# EAGLE board WAGband_2_on_board_final (EAGLE 7.5.0)
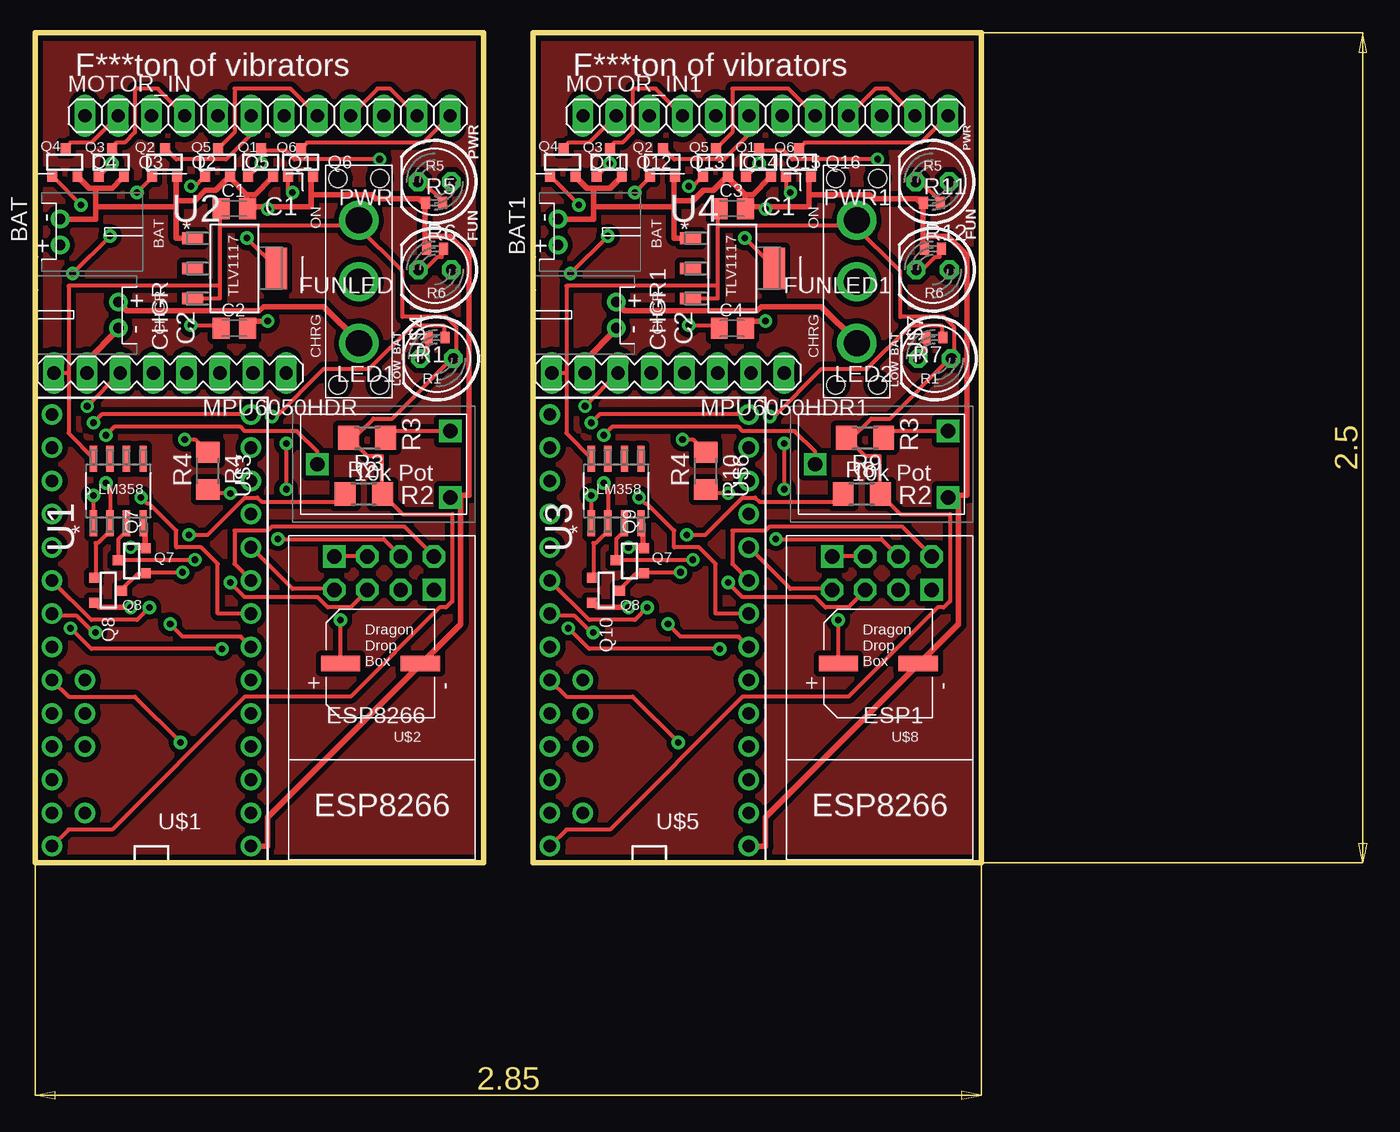
[diagram p0: board, top side]
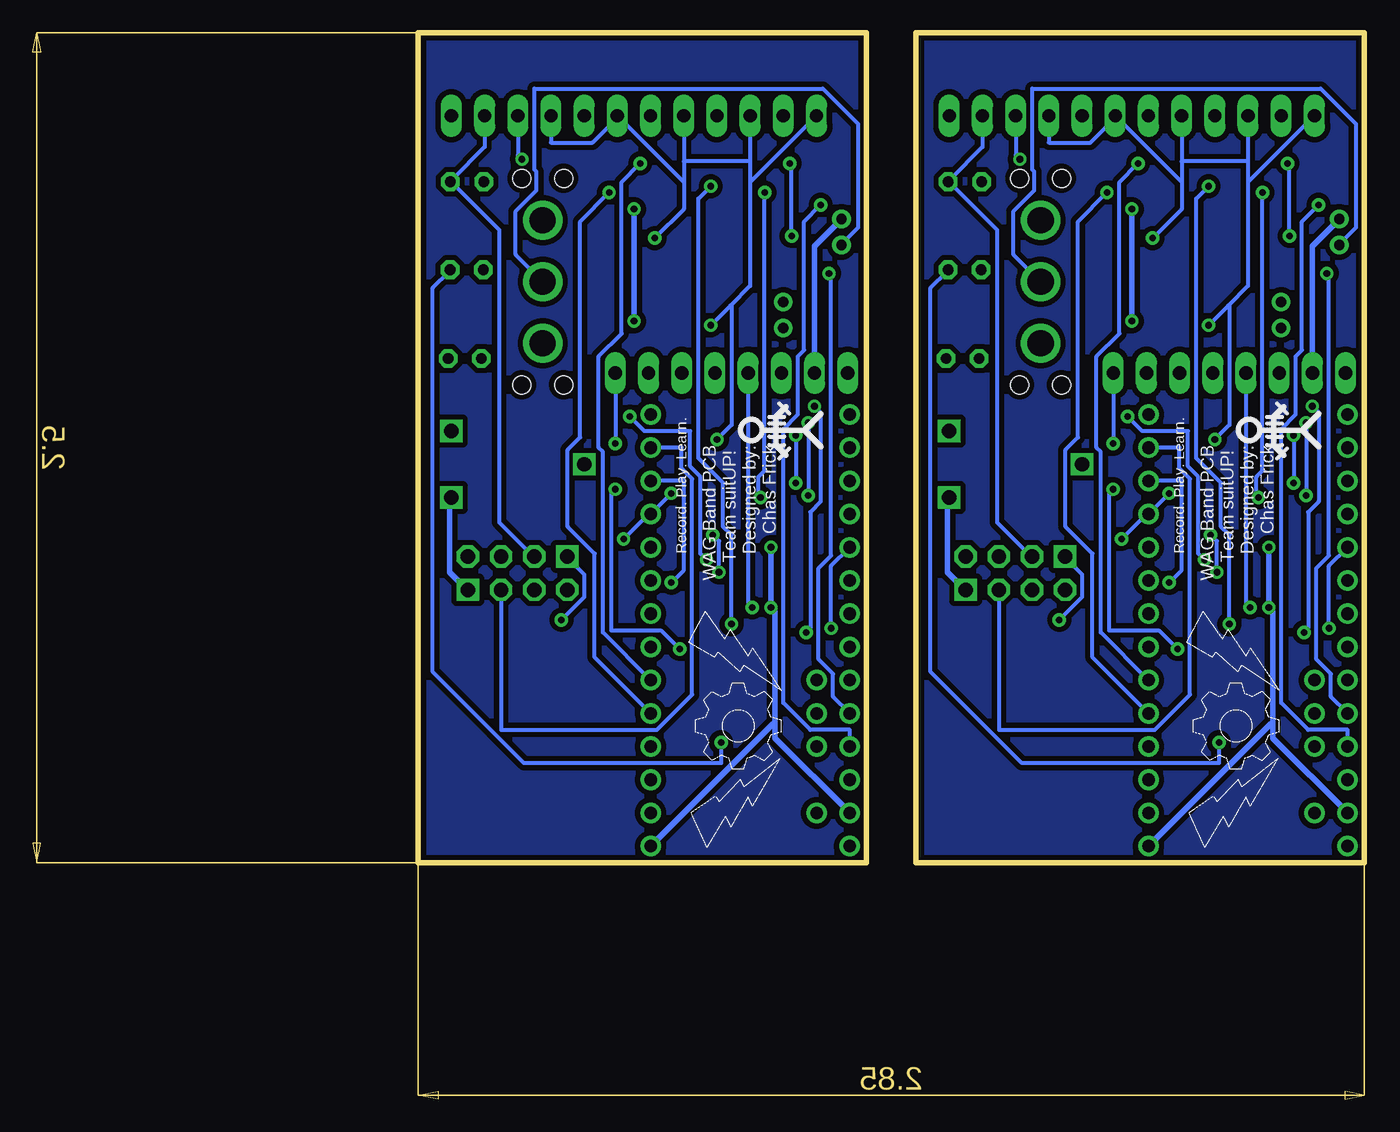
[diagram p1: board, bottom side, seen from below]

Size 72.39 x 63.5 mm. Coordinates in mm from the lower left corner, seen from the top.
Outline: 0,0 0,63.5 34.29,63.5 34.29,0 0,0
Outline: 38.1,0 38.1,63.5 72.39,63.5 72.39,0 38.1,0
Copper layers (1*16): Top 0.035mm / dielectric 1.5mm / Bottom 0.035mm
Design rules "default": minimum track width 8mil, minimum drill 20mil, track to track 10mil, track to pad 10mil, pad to pad 10mil, via to via 10mil, smd to smd 10mil, copper to edge 10mil, drill to drill 10mil, minimum pad ring 12mil, minimum via ring 10mil, stop-mask expansion 4mil, vias tented up to drill 20mil, thermal gap 10mil
Net classes: 0 default: width 0.305 mm, clearance 0.254 mm; 1 GND: width 0.406 mm, clearance 0.254 mm; 2 VCC: width 0.406 mm, clearance 0.254 mm

## Footprints (pad centres in the part's own frame; a part is rotated, then mirrored left to right if it is on the bottom)
JST-PH-2-THM-RA = drill 0.8 pad 1.422: 1 1,0; 2 -1,0
C0805K = smd 1.3 x 1.6: 1 -1,0; 2 1,0
ESP01 = drill 1.1 octagon: CH_PD -1.285,-8.178; GPIO0 1.255,-5.638; GPIO2 -1.285,-5.638; RST 1.255,-8.178; RX 3.795,-5.638; TX -3.825,-8.178 | drill 1.1 square: GND -3.825,-5.638; VCC 3.795,-8.178
LED5MM = drill 0.813 octagon: A -1.27,0; K 1.27,0
1X12 = drill 1.016 long: 1 -13.97,0; 2 -11.43,0; 3 -8.89,0; 4 -6.35,0; 5 -3.81,0; 6 -1.27,0; 7 1.27,0; 8 3.81,0; 9 6.35,0; 10 8.89,0; 11 11.43,0; 12 13.97,0
MPU6050 = drill 1.016 long: ADD 6.35,0; GND -6.35,0; INT 8.89,0; SCL -3.81,0; SDA -1.27,0; VCC -8.89,0; XCL 3.81,0; XDA 1.27,0
SOT-23 = smd 0.762 x 0.762: 1 -0.979,-1.101; 2 0.94,-1.101; 3 0.025,1.067
R0402 = smd 0.7 x 0.9: 1 -0.65,0; 2 0.65,0
R1206 = smd 1.6 x 1.803: 1 -1.422,0; 2 1.422,0
SOIC127P600X175-8N = smd 1.981 x 0.559: 1 -2.464,1.905; 2 -2.464,0.635; 3 -2.464,-0.635; 4 -2.464,-1.905; 5 2.464,-1.905; 6 2.464,-0.635; 7 2.464,0.635; 8 2.464,1.905
SOT230P700X180-4N = smd 1.626 x 0.889: 1 -3.2,2.311; 2 -3.2,0; 3 -3.2,-2.311 | smd 1.626 x 3.175: 4 3.2,0
TEENSY3-DIL+4 = drill 0.965: 0 -7.62,13.97; 1 -7.62,11.43; 2 -7.62,8.89; 3 -7.62,6.35; 3.3V 7.62,11.43; 4 -7.62,3.81; 5 -7.62,1.27; 6 -7.62,-1.27; 7 -7.62,-3.81; 8 -7.62,-6.35; 9 -7.62,-8.89; 10 -7.62,-11.43; 11 -7.62,-13.97; 12 -7.62,-16.51; 13 7.62,-16.51; 14/A0 7.62,-13.97; 15/A1 7.62,-11.43; 16/A2 7.62,-8.89; 17/A3 7.62,-6.35; 18/A4 7.62,-3.81; 19/A5 7.62,-1.27; 20/A6 7.62,1.27; 21/A7 7.62,3.81; 22/A8 7.62,6.35; 23/A9 7.62,8.89; A10 5.08,6.35; A11 5.08,3.81; AGND 7.62,13.97; AREF 5.08,8.89; GND -7.62,16.51; VIN 7.62,16.51; VUSB 5.08,13.97
TZV1000M = smd 1.2 x 3: + 0,3.05; - 0,-3.05
CB10 = drill 1.1 square: P$1 -2.54,-5.08; P$2 2.54,-5.08; P$3 0,5.08
SPDT = drill 2: P$1 0,-4.699; P$2 0,0; P$3 0,4.699 | hole 1.4: 1.6,7.899; -1.6,-7.899; 1.6,-7.899; -1.6,7.899

## Placement (x,y rotation side)
BAT  [JST-PH-2-THM-RA]  1.91,48.26 270 top
BAT1  [JST-PH-2-THM-RA]  40.01,48.26 270 top
C1  105  [C0805K]  15.24,50.04 0 top
C2  105  [C0805K]  15.24,40.89 0 top
C3  105  [C0805K]  53.34,50.04 0 top
C4  105  [C0805K]  53.34,40.89 0 top
CHGR  [JST-PH-2-THM-RA]  6.35,41.91 90 top
CHGR1  [JST-PH-2-THM-RA]  44.45,41.91 90 top
ESP1  ESP01  [ESP01]  64.77,15.24 180 top
ESP8266  ESP01  [ESP01]  26.67,15.24 180 top
FUNLED  [LED5MM]  30.58,45.36 180 top
FUNLED1  [LED5MM]  68.68,45.36 180 top
LED1  [LED5MM]  30.73,38.58 180 top
LED2  [LED5MM]  68.83,38.58 180 top
MOTOR_IN  [1X12]  17.78,57.15 0 top
MOTOR_IN1  [1X12]  55.88,57.15 0 top
MPU6050HDR  [MPU6050]  10.31,37.47 0 top
MPU6050HDR1  [MPU6050]  48.41,37.47 0 top
PWR  [LED5MM]  30.56,52.1 180 top
PWR1  [LED5MM]  68.66,52.1 180 top
Q1  [SOT-23]  17.27,53.59 0 top
Q2  [SOT-23]  9.91,53.59 0 top
Q3  [SOT-23]  5.84,53.59 0 top
Q4  [SOT-23]  2.29,53.59 0 top
Q5  [SOT-23]  13.97,53.59 0 top
Q6  [SOT-23]  20.32,53.59 0 top
Q7  [SOT-23]  7.37,23.11 90 top
Q8  [SOT-23]  5.59,20.83 270 top
Q9  [SOT-23]  45.47,23.11 90 top
Q10  [SOT-23]  43.69,20.83 270 top
Q11  [SOT-23]  40.39,53.59 0 top
Q12  [SOT-23]  43.94,53.59 0 top
Q13  [SOT-23]  48.01,53.59 0 top
Q14  [SOT-23]  52.07,53.59 0 top
Q15  [SOT-23]  55.37,53.59 0 top
Q16  [SOT-23]  58.42,53.59 0 top
R1  1k  [R0402]  30.71,40.18 180 top
R2  30k  [R1206]  25.15,28.19 0 top
R3  30k  [R1206]  25.4,32.51 180 top
R4  10k  [R1206]  13.21,29.97 270 top
R5  1k  [R0402]  30.51,50.5 0 top
R6  1k  [R0402]  30.58,46.96 0 top
R7  1k  [R0402]  68.81,40.18 180 top
R8  30k  [R1206]  63.25,28.19 0 top
R9  30k  [R1206]  63.5,32.51 180 top
R10  10k  [R1206]  51.31,29.97 270 top
R11  1k  [R0402]  68.61,50.5 0 top
R12  1k  [R0402]  68.68,46.96 0 top
U1  LM358DR  [SOIC127P600X175-8N]  6.35,28.45 90 top
U2  TLV1117-33CDCY  [SOT230P700X180-4N]  15.24,45.47 0 top
U3  LM358DR  [SOIC127P600X175-8N]  44.45,28.45 90 top
U4  TLV1117-33CDCY  [SOT230P700X180-4N]  53.34,45.47 0 top
U$1  TEENSY_3.1_DIL+4  [TEENSY3-DIL+4]  8.89,17.78 180 top
U$2  TZVCAP  [TZV1000M]  26.42,15.24 90 top
U$3  CB10LV103M  [CB10]  26.67,30.48 90 top
U$4  MS12ASW13  [SPDT]  24.77,44.45 0 top
U$5  TEENSY_3.1_DIL+4  [TEENSY3-DIL+4]  46.99,17.78 180 top
U$6  CB10LV103M  [CB10]  64.77,30.48 90 top
U$7  MS12ASW13  [SPDT]  62.87,44.45 0 top
U$8  TZVCAP  [TZV1000M]  64.52,15.24 90 top

## Library data of the parts
BAT BAT1 CHGR CHGR1 = adafruit
C1-C4 R1-R12 = resistor
ESP1 ESP8266 MPU6050HDR MPU6050HDR1 Q1-Q16 U$2-U$4 U$6-U$8 = mqp_custom_parts
FUNLED FUNLED1 LED1 LED2 PWR PWR1 = led
MOTOR_IN MOTOR_IN1 = pinhead
U1 U3 = Texas Instruments_By_element14_Batch_1; MPN: LM358DR; OC_FARNELL: 1831865; OC_NEWARK: 34K7599; PACKAGE: SOIC-8; SUPPLIER: Texas Instruments
U2 U4 = Texas Instruments_By_element14_Batch_1; MPN: TLV1117-33CDCY; OC_FARNELL: 1494942; OC_NEWARK: 67K8520; PACKAGE: SOT-223-3; SUPPLIER: TEXAS INSTRUMENTS
U$1 U$5 = Teensy_3_and_LC_Series_Boards_v1.1

## Nets
3.3V: U$1.3.3V
3.3V1: U$5.3.3V
AREF: U$1.AREF
AREF1: U$5.AREF
ESP8266_!RST: ESP8266.CH_PD R4.2 U$1.9
ESP8266_!RST1: ESP1.CH_PD R10.2 U$5.9
ESP8266_RX: ESP8266.RX U$1.8
ESP8266_RX1: ESP1.RX U$5.8
ESP8266_TX: ESP8266.TX U$1.7
ESP8266_TX1: ESP1.TX U$5.7
GND [GND]: BAT.2 C1.2 C2.2 CHGR.2 ESP8266.GND MPU6050HDR.GND Q1.2 Q2.2 Q3.2 Q4.2 Q5.2 Q6.2 Q7.2 Q8.2 R5.1 R6.1 U1.4 U2.1 U$1.AGND U$1.GND U$2.- U$3.P$1
GND1 [GND]: BAT1.2 C3.2 C4.2 CHGR1.2 ESP1.GND MPU6050HDR1.GND Q9.2 Q10.2 Q11.2 Q12.2 Q13.2 Q14.2 Q15.2 Q16.2 R11.1 R12.1 U3.4 U4.1 U$5.AGND U$5.GND U$6.P$1 U$8.-
GPIO0: ESP8266.GPIO0 U$1.10
GPIO1: ESP1.GPIO2 U$5.11
GPIO2: ESP8266.GPIO2 U$1.11
GPIO3: ESP1.GPIO0 U$5.10
LED_REF: Q7.3 R1.1 U1.3
LED_REF1: Q9.3 R7.1 U3.3
LOW_BATT_DIO: U1.1 U$1.12
LOW_BATT_DIO1: U3.1 U$5.12
M1: Q1.1 U$1.4
M2: Q2.1 U$1.6
M3: Q3.1 U$1.22/A8
M4: Q4.1 U$1.23/A9
M5: Q5.1 U$1.5
M6: Q6.1 U$1.3
M7: Q13.1 U$5.6
M8: Q14.1 U$5.5
M9: Q15.1 U$5.4
M10: Q16.1 U$5.3
M11: Q12.1 U$5.22/A8
M12: Q11.1 U$5.23/A9
N$1: MPU6050HDR.INT U$1.17/A3
N$2: MPU6050HDR.SDA U$1.18/A4
N$3: FUNLED.A U$1.21/A7
N$4: FUNLED.K R6.2
N$7: MOTOR_IN1.12 Q16.3
N$8: MOTOR_IN1.10 Q15.3
N$9: MOTOR_IN.12 Q6.3
N$10: MOTOR_IN.10 Q1.3
N$11: MOTOR_IN.8 Q5.3
N$12: MOTOR_IN1.8 Q14.3
N$13: MOTOR_IN.6 Q2.3
N$14: MOTOR_IN.2 Q4.3
N$15: MOTOR_IN.4 Q3.3
N$16: MOTOR_IN1.6 Q13.3
N$17: MPU6050HDR.SCL U$1.19/A5
N$18: MOTOR_IN1.2 Q11.3
N$19: MOTOR_IN1.4 Q12.3
N$20: MPU6050HDR1.SCL U$5.19/A5
N$21: PWR.K R5.2
N$22: LED1.K R1.2
N$23: Q7.1 Q8.3 R2.1
N$24: PWR1.K R11.2
N$25: LED2.K R7.2
N$26: Q9.1 Q10.3 R8.1
N$27: R3.1 U$3.P$2
N$28: BAT.1 U$4.P$2
N$29 [VCC]: CHGR.1 U$4.P$1
N$30: R9.1 U$6.P$2
N$31: BAT1.1 U$7.P$2
N$32 [VCC]: CHGR1.1 U$7.P$1
N$33: MPU6050HDR1.INT U$5.17/A3
N$34: MPU6050HDR1.SDA U$5.18/A4
N$35: FUNLED1.K R12.2
N$36: FUNLED1.A U$5.21/A7
POT_REF: Q8.1 U1.2 U$3.P$3
POT_REF1: Q10.1 U3.2 U$6.P$3
VCC: C2.1 ESP8266.RST ESP8266.VCC MOTOR_IN.1 MOTOR_IN.3 MOTOR_IN.5 MOTOR_IN.7 MOTOR_IN.9 MOTOR_IN.11 PWR.A R4.1 U2.4 U$2.+
VCC1: C4.1 ESP1.RST ESP1.VCC MOTOR_IN1.1 MOTOR_IN1.3 MOTOR_IN1.5 MOTOR_IN1.7 MOTOR_IN1.9 MOTOR_IN1.11 PWR1.A R10.1 U4.4 U$8.+
VDD: C1.1 LED1.A MPU6050HDR.VCC R2.2 R3.2 U1.8 U2.3 U$1.VIN U$4.P$3
VDD1: C3.1 LED2.A MPU6050HDR1.VCC R8.2 R9.2 U3.8 U4.3 U$5.VIN U$7.P$3
VUSB: U$1.VUSB
VUSB1: U$5.VUSB

## Tracks (layer width: path | path; a pad name or v marks a point on that pad's centre or on a via)
ESP8266_!RST  (via drill 0.51)
  Top 0.305: v14.92,28.26 13.49,28.26 13.34,28.42 R4.2 | v18.57,24.77 26.67,24.77 27.94,23.5 ESP8266.CH_PD
  Bottom 0.305: v14.92,28.26 U$1.9 16.51,26.83 v18.57,24.77
ESP8266_!RST1  (via drill 0.51)
  Top 0.305: v53.02,28.26 51.59,28.26 51.44,28.42 R10.2 | v56.67,24.77 64.77,24.77 66.04,23.5 ESP1.CH_PD
  Bottom 0.305: v53.02,28.26 U$5.9 54.61,26.83 v56.67,24.77
ESP8266_RX
  Top 0.305: U$1.8 19.68,20.95 22.86,20.95 ESP8266.RX
ESP8266_RX1
  Top 0.305: U$5.8 57.78,20.95 60.96,20.95 ESP1.RX
ESP8266_TX
  Top 0.305: U$1.7 15.24,22.86 15.24,25.4 17.78,25.4 18.1,25.72 28.26,25.72 30.48,23.5 ESP8266.TX
ESP8266_TX1
  Top 0.305: U$5.7 53.34,22.86 53.34,25.4 55.88,25.4 56.2,25.72 66.36,25.72 68.58,23.5 ESP1.TX
GND  (via drill 0.51)
  Top 0.406: 29.84,47.94 29.84,46.99 R6.1 | 29.84,47.94 29.84,50.48 R5.1 29.69,50.48 29.37,50.8 26.04,50.8 25.72,51.12 21.11,51.12 | 16.19,51.12 14.92,52.39 Q5.2 14.76,52.39 13.81,51.44 13.02,51.44 12.22,50.64 10.79,50.64 | 16.19,51.12 16.19,50.16 C1.2 16.35,50.16 17.78,50.16 | 16.19,51.12 16.83,51.12 18.1,52.39 Q1.2 | 21.11,51.12 21.11,50.16 17.78,50.16 | 21.11,51.12 21.11,52.39 Q6.2 | v17.78,41.43 16.83,41.43 16.35,40.96 C2.2 | v17.78,50.01 17.78,50.16 | CHGR.2 6.35,40.8 3.97,38.42 MPU6050HDR.GND | 10.79,50.16 10.79,47.78 11.91,47.78 U2.1 | 10.79,50.16 10.79,50.64 | 10.79,50.64 10.79,52.39 Q2.2 | 4.6,51.59 5.87,51.59 6.67,52.39 Q3.2 | 4.6,51.59 4.13,51.59 3.33,52.39 Q4.2 | 4.6,50.16 4.6,49.21 1.91,49.21 BAT.2 | 4.6,50.16 4.6,51.59 | 4.6,50.16 10.79,50.16 | U1.4 8.26,25.88 8.41,25.88 8.41,24.13 Q7.2 8.26,24.13 v7.3,24.13 | v7.3,19.53 4.92,19.53 4.6,19.84 Q8.2 | U$1.GND 17.78,1.27 17.78,3.49 29.37,15.08 U$2.- 29.53,15.24 32.54,18.26 32.54,27.94 U$3.P$1 32.54,28.1 33.18,28.1 33.18,46.51 31.75,47.94 29.84,47.94
  Bottom 0.406: v17.78,50.01 v17.78,41.43 | MPU6050HDR.GND 3.97,47.15 1.91,49.21 BAT.2 | U$3.P$1 31.91,27.78 31.91,22.23 30.64,20.95 ESP8266.GND | 6.99,10.64 6.99,9.53 U$1.AGND | 6.99,10.64 6.99,19.21 v7.3,19.53 v7.3,24.13 | U$1.GND 7.14,10.64 6.99,10.64
GND1  (via drill 0.51)
  Top 0.406: 67.94,47.94 67.94,46.99 R12.1 | 67.94,47.94 67.94,50.48 R11.1 67.79,50.48 67.47,50.8 64.14,50.8 63.82,51.12 59.21,51.12 | 54.29,51.12 53.02,52.39 Q14.2 52.86,52.39 51.91,51.44 51.12,51.44 50.32,50.64 48.9,50.64 | 54.29,51.12 54.29,50.16 C3.2 54.45,50.16 55.88,50.16 | 54.29,51.12 54.93,51.12 56.2,52.39 Q15.2 | 59.21,51.12 59.21,50.16 55.88,50.16 | 59.21,51.12 59.21,52.39 Q16.2 | v55.88,41.43 54.93,41.43 54.45,40.96 C4.2 | v55.88,50.01 55.88,50.16 | CHGR1.2 44.45,40.8 42.07,38.42 MPU6050HDR1.GND | 48.9,50.16 48.9,47.78 50.01,47.78 U4.1 | 48.9,50.16 48.9,50.64 | 48.9,50.64 48.9,52.39 Q13.2 | 42.7,51.59 43.97,51.59 44.77,52.39 Q12.2 | 42.7,51.59 42.23,51.59 41.43,52.39 Q11.2 | 42.7,50.16 42.7,49.21 40.01,49.21 BAT1.2 | 42.7,50.16 42.7,51.59 | 42.7,50.16 48.9,50.16 | U3.4 46.35,25.88 46.51,25.88 46.51,24.13 Q9.2 46.35,24.13 v45.4,24.13 | v45.4,19.53 43.02,19.53 42.7,19.84 Q10.2 | U$5.GND 55.88,1.27 55.88,3.49 67.47,15.08 U$8.- 67.63,15.24 70.64,18.26 70.64,27.94 U$6.P$1 70.64,28.1 71.28,28.1 71.28,46.51 69.85,47.94 67.94,47.94
  Bottom 0.406: v55.88,50.01 v55.88,41.43 | MPU6050HDR1.GND 42.07,47.15 40.01,49.21 BAT1.2 | U$6.P$1 70.01,27.78 70.01,22.23 68.74,20.95 ESP1.GND | 45.09,10.64 45.09,9.53 U$5.AGND | 45.09,10.64 45.09,19.21 v45.4,19.53 v45.4,24.13 | U$5.GND 45.24,10.64 45.09,10.64
GPIO0  (via drill 0.51)
  Top 0.305: v14.92,21.43 16.03,20.32 21.59,20.32 22.38,19.53 24.13,19.53 25.4,20.8 ESP8266.GPIO0
  Bottom 0.305: U$1.10 13.97,29.21 13.97,22.38 v14.92,21.43
GPIO1
  Bottom 0.305: U$5.11 52.23,31.75 52.23,30.16 51.44,29.37 51.44,12.86 54.13,10.16 66.04,10.16 66.04,20.8 ESP1.GPIO2
GPIO2
  Bottom 0.305: U$1.11 14.13,31.75 14.13,30.16 13.34,29.37 13.34,12.86 16.03,10.16 27.94,10.16 27.94,20.8 ESP8266.GPIO2
GPIO3  (via drill 0.51)
  Top 0.305: v53.02,21.43 54.13,20.32 59.69,20.32 60.48,19.53 62.23,19.53 63.5,20.8 ESP1.GPIO0
  Bottom 0.305: U$5.10 52.07,29.21 52.07,22.38 v53.02,21.43
LED_REF  (via drill 0.51)
  Top 0.305: 6.35,23.18 6.35,24.77 6.99,25.4 U1.3 | v18.1,34.13 18.41,34.13 22.07,37.78 25.56,37.78 28.89,41.12 31.27,41.12 31.27,40.32 R1.1 | 6.35,23.18 v12.22,23.18 | 6.35,23.18 Q7.3
  Bottom 0.305: v18.1,34.13 16.99,33.02 13.49,33.02 13.49,30.32 12.7,29.53 12.7,23.65 v12.22,23.18
LED_REF1  (via drill 0.51)
  Top 0.305: 44.45,23.18 44.45,24.77 45.09,25.4 U3.3 | v56.2,34.13 56.52,34.13 60.17,37.78 63.66,37.78 66.99,41.12 69.37,41.12 69.37,40.32 R7.1 | 44.45,23.18 v50.32,23.18 | 44.45,23.18 Q9.3
  Bottom 0.305: v56.2,34.13 55.09,33.02 51.59,33.02 51.59,30.32 50.8,29.53 50.8,23.65 v50.32,23.18
LOW_BATT_DIO  (via drill 0.51)
  Top 0.305: v4.45,28.1 U1.1 | v4.45,33.66 5.08,34.29 U$1.12
  Bottom 0.305: v4.45,33.66 v4.45,28.1
LOW_BATT_DIO1  (via drill 0.51)
  Top 0.305: v42.55,28.1 U3.1 | v42.55,33.66 43.18,34.29 U$5.12
  Bottom 0.305: v42.55,33.66 v42.55,28.1
M1  (via drill 0.51)
  Top 0.305: v17.3,53.5 16.35,52.55 Q1.1
  Bottom 0.305: v17.3,53.5 18.73,52.07 18.73,40.48 20.48,38.73 20.48,31.75 20.16,31.43 20.16,17.62 U$1.4
M2  (via drill 0.51)
  Top 0.305: v7.78,51.28 8.89,52.39 Q2.1 | v8.1,27.94 8.57,27.46 8.73,27.46 10.79,25.4 10.79,24.13 12.7,24.13 13.97,22.86 13.97,19.05 U$1.6
  Bottom 0.305: v7.78,51.28 7.78,30 8.26,29.53 8.26,28.1 v8.1,27.94
M3  (via drill 0.51)
  Top 0.305: v5.87,53.5 4.92,52.55 Q3.1 | v2.86,45.09 v5.71,47.94
  Bottom 0.305: v5.87,53.5 5.71,53.34 v5.71,47.94 | v2.86,45.09 2.7,44.93 2.7,23.5 3.65,22.54 3.65,15.56 2.54,14.45 2.54,12.7 U$1.22/A8
M4  (via drill 0.51)
  Top 0.305: v3.49,50.32 1.43,52.39 Q4.1
  Bottom 0.305: v3.49,50.32 4.76,49.05 4.76,39.21 5.24,38.73 5.24,34.29 6.35,33.18 6.35,12.22 4.29,10.16 1.27,10.16 U$1.23/A9
M5  (via drill 0.51)
  Top 0.305: v11.91,51.75 12.22,51.75 12.86,52.39 Q5.1 | v10.32,18.26 11.27,17.3 15.72,17.3 U$1.5
  Bottom 0.305: v11.91,51.75 12.86,50.8 12.86,30.96 10.95,29.05 10.95,25.72 10.32,25.08 v10.32,18.26
M6  (via drill 0.51)
  Top 0.305: v19.68,51.28 19.37,51.28 19.37,52.39 Q6.1
  Bottom 0.305: v19.68,51.28 21.91,49.05 21.91,32.54 22.86,31.59 22.86,25.72 20.8,23.65 20.8,15.72 U$1.3
M7  (via drill 0.51)
  Top 0.305: v45.88,51.28 46.99,52.39 Q13.1 | v46.2,27.94 46.67,27.46 46.83,27.46 48.9,25.4 48.9,24.13 50.8,24.13 52.07,22.86 52.07,19.05 U$5.6
  Bottom 0.305: v45.88,51.28 45.88,30 46.35,29.53 46.35,28.1 v46.2,27.94
M8  (via drill 0.51)
  Top 0.305: v50.01,51.75 50.32,51.75 50.96,52.39 Q14.1 | v48.42,18.26 49.37,17.3 53.82,17.3 U$5.5
  Bottom 0.305: v50.01,51.75 50.96,50.8 50.96,30.96 49.05,29.05 49.05,25.72 48.42,25.08 v48.42,18.26
M9  (via drill 0.51)
  Top 0.305: v55.4,53.5 54.45,52.55 Q15.1
  Bottom 0.305: v55.4,53.5 56.83,52.07 56.83,40.48 58.58,38.73 58.58,31.75 58.26,31.43 58.26,17.62 U$5.4
M10  (via drill 0.51)
  Top 0.305: v57.78,51.28 57.47,51.28 57.47,52.39 Q16.1
  Bottom 0.305: v57.78,51.28 60.01,49.05 60.01,32.54 60.96,31.59 60.96,25.72 58.9,23.65 58.9,15.72 U$5.3
M11  (via drill 0.51)
  Top 0.305: v43.97,53.5 43.02,52.55 Q12.1 | v40.96,45.09 v43.81,47.94
  Bottom 0.305: v43.97,53.5 43.81,53.34 v43.81,47.94 | v40.96,45.09 40.8,44.93 40.8,23.5 41.75,22.54 41.75,15.56 40.64,14.45 40.64,12.7 U$5.22/A8
M12  (via drill 0.51)
  Top 0.305: v41.59,50.32 39.53,52.39 Q11.1
  Bottom 0.305: v41.59,50.32 42.86,49.05 42.86,39.21 43.34,38.73 43.34,34.29 44.45,33.18 44.45,12.22 42.39,10.16 39.37,10.16 U$5.23/A9
N$1  (via drill 0.51)
  Top 0.305: v2.7,17.94 4.29,16.35 v14.29,16.35 | v19.21,32.07 v19.21,28.57
  Bottom 0.305: U$1.17/A3 2.7,22.7 v2.7,17.94 | v14.29,16.35 15.72,17.78 19.53,17.78 19.53,28.26 v19.21,28.57 | v19.21,32.07 MPU6050HDR.INT
N$2  (via drill 0.51)
  Top 0.305: U$1.18/A4 4.29,18.57 7.78,18.57 v8.73,19.53
  Bottom 0.305: v8.73,19.53 9.05,19.84 MPU6050HDR.SDA
N$3  (via drill 0.51)
  Top 0.305: v11.11,9.21 7.62,12.7 2.54,12.7 U$1.21/A7
  Bottom 0.305: v11.11,9.21 11.11,7.62 26.19,7.62 33.18,14.61 33.18,43.97 31.91,45.24 FUNLED.A
N$4
  Top 0.305: R6.2 31.11,46.83 31.11,46.35 30.8,46.35 29.84,45.4 29.37,45.4 FUNLED.K
N$7
  Top 0.305: MOTOR_IN1.12 67.79,55.09 58.9,55.09 58.58,54.77 Q16.3
N$8  (via drill 0.51)
  Top 0.305: v64.45,53.82 57.94,53.82 57.31,54.45 55.56,54.45 55.4,54.61 Q15.3
  Bottom 0.305: v64.45,53.82 64.77,54.13 MOTOR_IN1.10
N$9
  Top 0.305: MOTOR_IN.12 29.69,55.09 20.8,55.09 20.48,54.77 Q6.3
N$10  (via drill 0.51)
  Top 0.305: v26.35,53.82 19.84,53.82 19.21,54.45 17.46,54.45 17.3,54.61 Q1.3
  Bottom 0.305: v26.35,53.82 26.67,54.13 MOTOR_IN.10
N$11
  Top 0.305: MOTOR_IN.8 19.53,59.21 15.24,59.21 15.24,55.88 14.13,54.77 Q5.3
N$12
  Top 0.305: MOTOR_IN1.8 57.63,59.21 53.34,59.21 53.34,55.88 52.23,54.77 Q14.3
N$13
  Top 0.305: MOTOR_IN.6 16.51,55.72 14.61,53.82 10.79,53.82 10,54.61 Q2.3
N$14
  Top 0.305: MOTOR_IN.2 4.29,55.09 2.7,55.09 2.38,54.77 Q4.3
N$15
  Top 0.305: MOTOR_IN.4 9.37,59.21 7.62,59.21 7.62,55.88 6.83,55.09 6.19,55.09 5.87,54.77 Q3.3
N$16
  Top 0.305: MOTOR_IN1.6 54.61,55.72 52.7,53.82 48.9,53.82 48.1,54.61 Q13.3
N$17  (via drill 0.51)
  Top 0.305: U$1.19/A5 1.43,18.89 3.17,18.89 4.45,17.62 v4.6,17.62 | v3.97,34.92 MPU6050HDR.SCL
  Bottom 0.305: v4.6,17.62 4.29,17.94 4.29,26.83 3.49,27.62 3.49,34.45 v3.97,34.92
N$18
  Top 0.305: MOTOR_IN1.2 42.39,55.09 40.8,55.09 40.48,54.77 Q11.3
N$19
  Top 0.305: MOTOR_IN1.4 47.47,59.21 45.72,59.21 45.72,55.88 44.93,55.09 44.29,55.09 43.97,54.77 Q12.3
N$20  (via drill 0.51)
  Top 0.305: U$5.19/A5 39.53,18.89 41.27,18.89 42.55,17.62 v42.7,17.62 | v42.07,34.92 MPU6050HDR1.SCL
  Bottom 0.305: v42.7,17.62 42.39,17.94 42.39,26.83 41.59,27.62 41.59,34.45 v42.07,34.92
N$21
  Top 0.305: R5.2 31.11,50.64 29.69,52.07 29.37,52.07 PWR.K
N$22
  Top 0.305: R1.2 30,40.16 30,38.73 29.53,38.73 LED1.K
N$23  (via drill 0.51)
  Top 0.305: Q8.3 6.67,20.95 7.78,22.07 8.41,22.07 Q7.1 8.57,22.23 v11.27,22.23 | v11.75,25.08 13.18,25.08 16.03,27.94 16.99,27.94 17.3,27.62 23.18,27.62 23.65,28.1 R2.1
  Bottom 0.305: v11.75,25.08 11.27,24.61 v11.27,22.23
N$24
  Top 0.305: R11.2 69.22,50.64 67.79,52.07 67.47,52.07 PWR1.K
N$25
  Top 0.305: R7.2 68.1,40.16 68.1,38.73 67.63,38.73 LED2.K
N$26  (via drill 0.51)
  Top 0.305: Q10.3 44.77,20.95 45.88,22.07 46.51,22.07 Q9.1 46.67,22.23 v49.37,22.23 | v49.85,25.08 51.28,25.08 54.13,27.94 55.09,27.94 55.4,27.62 61.28,27.62 61.75,28.1 R8.1
  Bottom 0.305: v49.85,25.08 49.37,24.61 v49.37,22.23
N$27
  Top 0.305: U$3.P$2 27.3,33.02 26.83,32.54 R3.1
N$28
  Bottom 0.305: U$4.P$2 26.83,46.51 26.83,49.85 25.24,51.44 25.24,52.86 25.4,53.02 25.4,59.21 3.33,59.21 0.64,56.52 0.64,48.58 1.91,47.31 BAT.1
N$29
  Top 0.406: CHGR.1 6.35,42.86 6.99,42.23 17.14,42.23 17.46,42.55 22.07,42.55 24.77,39.85 U$4.P$1
N$30
  Top 0.305: U$6.P$2 65.41,33.02 64.93,32.54 R9.1
N$31
  Bottom 0.305: U$7.P$2 64.93,46.51 64.93,49.85 63.34,51.44 63.34,52.86 63.5,53.02 63.5,59.21 41.43,59.21 38.73,56.52 38.73,48.58 40.01,47.31 BAT1.1
N$32
  Top 0.406: CHGR1.1 44.45,42.86 45.09,42.23 55.24,42.23 55.56,42.55 60.17,42.55 62.87,39.85 U$7.P$1
N$33  (via drill 0.51)
  Top 0.305: v40.8,17.94 42.39,16.35 v52.39,16.35 | v57.31,32.07 v57.31,28.57
  Bottom 0.305: U$5.17/A3 40.8,22.7 v40.8,17.94 | v52.39,16.35 53.82,17.78 57.63,17.78 57.63,28.26 v57.31,28.57 | v57.31,32.07 MPU6050HDR1.INT
N$34  (via drill 0.51)
  Top 0.305: U$5.18/A4 42.39,18.57 45.88,18.57 v46.83,19.53
  Bottom 0.305: v46.83,19.53 47.15,19.84 MPU6050HDR1.SDA
N$35
  Top 0.305: R12.2 69.22,46.83 69.22,46.35 68.9,46.35 67.94,45.4 67.47,45.4 FUNLED1.K
N$36  (via drill 0.51)
  Top 0.305: v49.21,9.21 45.72,12.7 40.64,12.7 U$5.21/A7
  Bottom 0.305: v49.21,9.21 49.21,7.62 64.29,7.62 71.28,14.61 71.28,43.97 70.01,45.24 FUNLED1.A
POT_REF  (via drill 0.51)
  Top 0.305: Q8.1 4.6,21.91 4.6,24.45 4.76,24.45 5.71,25.4 U1.2 5.71,29.05 v5.4,29.05 | v5.4,32.7 6.03,33.34 15.72,33.34 16.03,33.02 20,33.02 21.59,31.43 U$3.P$3
  Bottom 0.305: v5.4,32.7 v5.4,29.05
POT_REF1  (via drill 0.51)
  Top 0.305: Q10.1 42.7,21.91 42.7,24.45 42.86,24.45 43.81,25.4 U3.2 43.81,29.05 v43.5,29.05 | v43.5,32.7 44.13,33.34 53.82,33.34 54.13,33.02 58.1,33.02 59.69,31.43 U$6.P$3
  Bottom 0.305: v43.5,32.7 v43.5,29.05
S$9
  pour Top (isolate 0.406): 0,0 0,63.5 34.29,63.5 34.29,62.87 34.29,0
S$10
  pour Top (isolate 0.406): 38.1,63.5 72.39,63.5 72.39,0 38.1,0
S$11
  pour Bottom (isolate 0.406): 0,63.5 34.29,63.5 34.29,0 0,0
S$12
  pour Bottom (isolate 0.406): 38.1,63.5 72.39,63.5 72.39,0 38.1,0
VCC  (via drill 0.51)
  Top 0.305: v16.19,47.78 18.41,45.56 U2.4 | v11.91,41.12 13.97,41.12 14.13,40.96 C2.1 | v11.43,32.38 12.22,32.38 13.18,31.43 R4.1 | v23.34,18.57 23.34,15.24 U$2.+ | ESP8266.RST 25.4,23.5 23.02,23.5 ESP8266.VCC | MOTOR_IN.9 26.19,59.21 27.15,59.21 MOTOR_IN.11
  Bottom 0.305: v16.19,47.78 13.97,50.01 13.97,52.07 | MOTOR_IN.5 13.97,53.66 | 13.97,53.66 13.97,52.07 | 13.97,52.07 MOTOR_IN.7 19.05,56.99 20.95,55.09 24.13,55.09 MOTOR_IN.9 | 10.4,42.62 8.89,44.13 8.89,52.07 | 10.4,42.62 v11.91,41.12 | MOTOR_IN.3 8.89,53.66 | 8.89,53.66 8.89,52.07 | v11.43,32.38 10.32,33.5 10.32,42.55 10.4,42.62 | 8.89,52.07 MOTOR_IN.1 | 8.89,53.66 13.97,53.66 | v23.34,18.57 21.59,20.32 21.59,22.07 22.86,23.34 ESP8266.VCC | MOTOR_IN.11 29.21,54.77 31.75,52.23 PWR.A 31.75,52.07 28.1,48.42 28.1,26.04 25.56,23.5 ESP8266.RST
VCC1  (via drill 0.51)
  Top 0.305: v54.29,47.78 56.52,45.56 U4.4 | v50.01,41.12 52.07,41.12 52.23,40.96 C4.1 | v49.53,32.38 50.32,32.38 51.28,31.43 R10.1 | v61.44,18.57 61.44,15.24 U$8.+ | ESP1.RST 63.5,23.5 61.12,23.5 ESP1.VCC | MOTOR_IN1.9 64.29,59.21 65.25,59.21 MOTOR_IN1.11
  Bottom 0.305: v54.29,47.78 52.07,50.01 52.07,52.07 | MOTOR_IN1.5 52.07,53.66 | 52.07,53.66 52.07,52.07 | 52.07,52.07 MOTOR_IN1.7 57.15,56.99 59.05,55.09 62.23,55.09 MOTOR_IN1.9 | 48.5,42.62 46.99,44.13 46.99,52.07 | 48.5,42.62 v50.01,41.12 | MOTOR_IN1.3 46.99,53.66 | 46.99,53.66 46.99,52.07 | v49.53,32.38 48.42,33.5 48.42,42.55 48.5,42.62 | 46.99,52.07 MOTOR_IN1.1 | 46.99,53.66 52.07,53.66 | v61.44,18.57 59.69,20.32 59.69,22.07 60.96,23.34 ESP1.VCC | MOTOR_IN1.11 67.31,54.77 69.85,52.23 PWR1.A 69.85,52.07 66.2,48.42 66.2,26.04 63.66,23.5 ESP1.RST
VDD
  Top 0.305: 2.54,37.47 2.54,32.86 4.45,30.96 U1.8 | MPU6050HDR.VCC 2.54,37.47 | 14.13,44.13 14.13,43.18 12.06,43.18 U2.3 | 14.13,44.13 14.13,48.74 | 14.13,48.74 14.13,50.01 C1.1 | 14.13,48.74 24.45,48.74 24.77,49.05 U$4.P$3 24.61,48.74 28.1,45.24 28.1,41.75 31.43,41.75 32.23,40.96 32.23,38.73 32.07,38.73 LED1.A 31.91,38.58 27.3,33.97 25.88,33.97 24.29,32.38 R3.2 24.13,32.38 25.4,31.11 26.51,31.11 26.51,28.26 R2.2 26.67,28.1 28.1,26.67 31.91,26.67 31.91,20 31.43,19.53 30.96,19.53 24.13,12.7 16.03,12.7 5.87,2.54 2.54,2.54 U$1.VIN | 2.54,37.47 2.54,44.13 14.13,44.13
VDD1
  Top 0.305: 40.64,37.47 40.64,32.86 42.55,30.96 U3.8 | MPU6050HDR1.VCC 40.64,37.47 | 52.23,44.13 52.23,43.18 50.16,43.18 U4.3 | 52.23,44.13 52.23,48.74 | 52.23,48.74 52.23,50.01 C3.1 | 52.23,48.74 62.55,48.74 62.87,49.05 U$7.P$3 62.71,48.74 66.2,45.24 66.2,41.75 69.53,41.75 70.33,40.96 70.33,38.73 70.17,38.73 LED2.A 70.01,38.58 65.41,33.97 63.98,33.97 62.39,32.38 R9.2 62.23,32.38 63.5,31.11 64.61,31.11 64.61,28.26 R8.2 64.77,28.1 66.2,26.67 70.01,26.67 70.01,20 69.53,19.53 69.06,19.53 62.23,12.7 54.13,12.7 43.97,2.54 40.64,2.54 U$5.VIN | 40.64,37.47 40.64,44.13 52.23,44.13

## Text on the board
tPlace: F***ton of vibrators | F***ton of vibrators | PWR | PWR | Q4 | Q3 | Q2 | Q5 | Q1 | Q6 | R5 | Q4 | Q3 | Q2 | Q5 | Q1 | Q6 | R5 | C1 | FUN | C1 | FUN | BAT | ON | BAT | ON | TLV1117 | TLV1117 | R6 | R6 | LOW_BAT | LOW_BAT | CHGR | C2 | CHGR | C2 | CHRG | CHRG | R1 | R1 | R3 | R3 | R4 | R4 | LM358 | LM358 | R2 | R2 | Q7 | Q7 | Q8 | Q8 | Dragon / Drop / Box | Dragon / Drop / Box
bPlace: Record. Play. Learn. | Record. Play. Learn. | WAG Band PCB / Team suitUP! / Designed by: / Chas Frick | WAG Band PCB / Team suitUP! / Designed by: / Chas Frick
201bmp: C:/Users/Chas/Desktop/Untitled.bmp | C:/Users/Chas/Desktop/Untitled.bmp